# Altium PCB [N76E003] Kit.PcbDoc
Units mm, origin at the board's own origin, x right, y up, seen from the top; angles counter-clockwise.
Board outline 39.88 x 56.64 mm, 2 copper layers (Top Layer, Bottom Layer); 29 components, 42 nets, 177 pads, 21 vias.
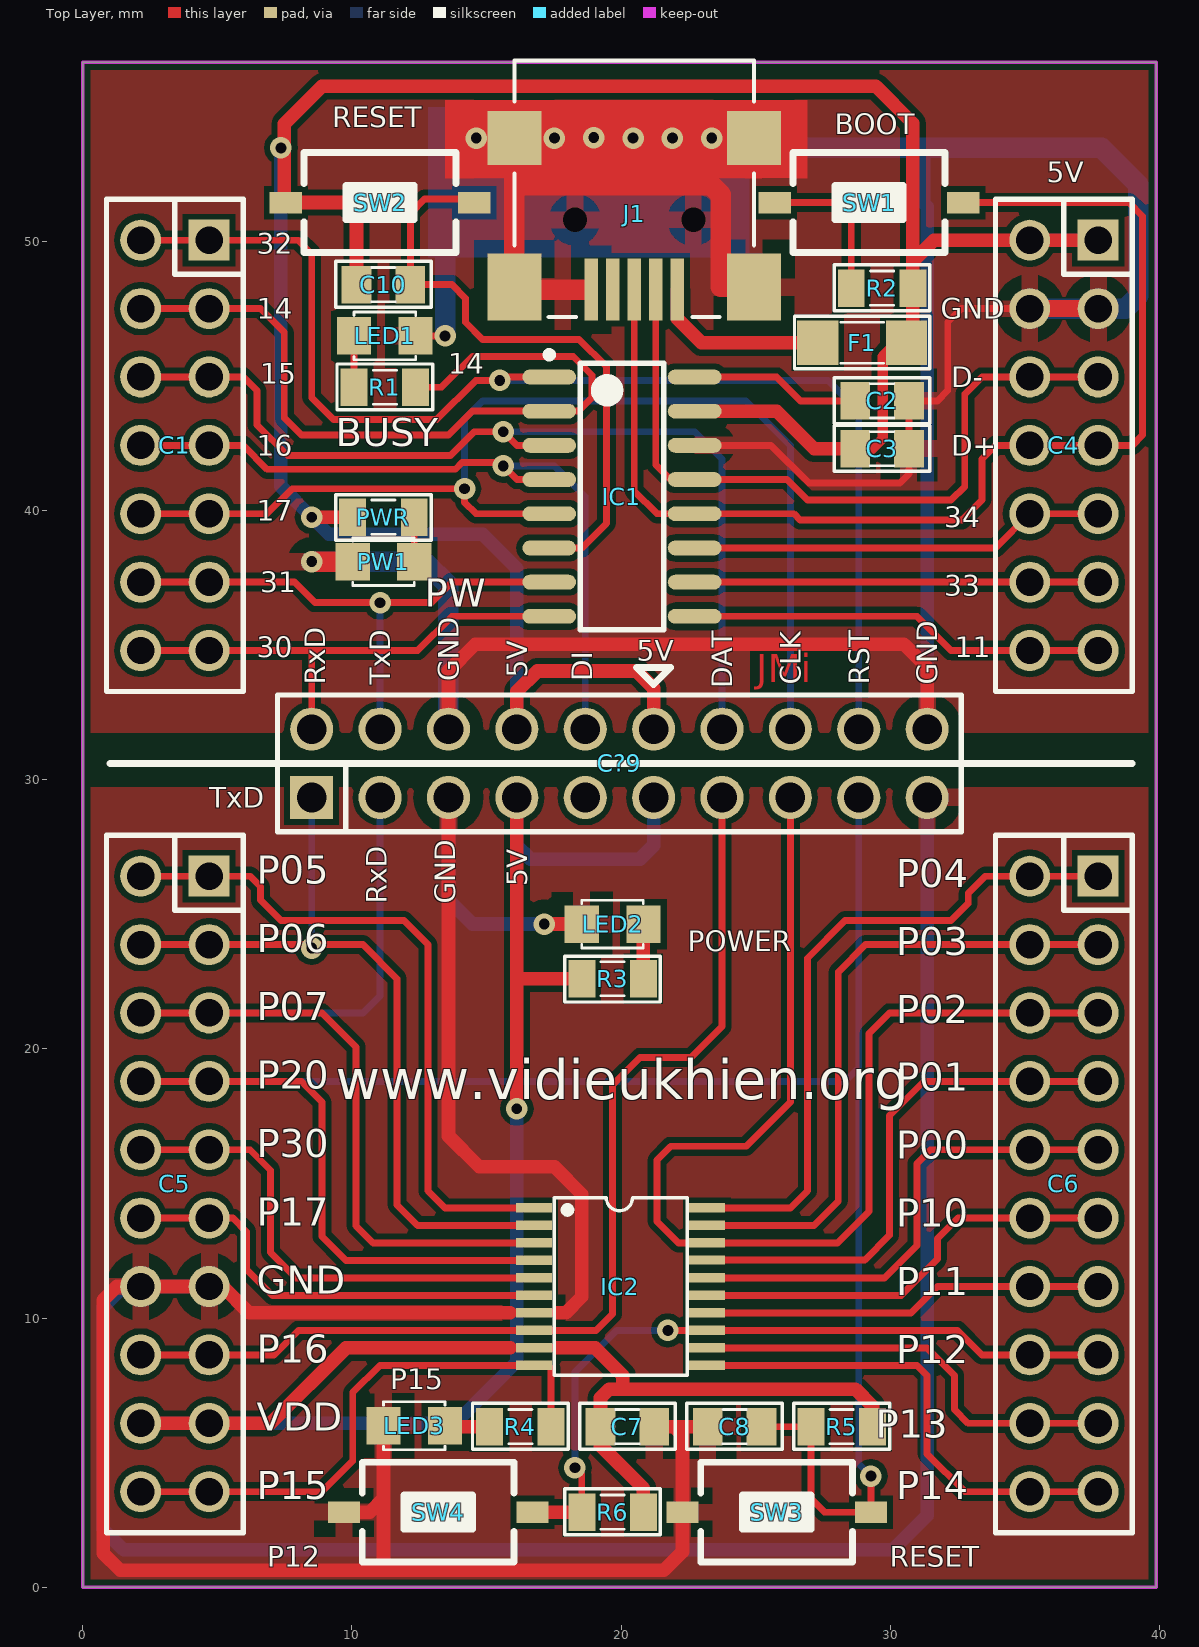
[diagram p0: Top Layer view]
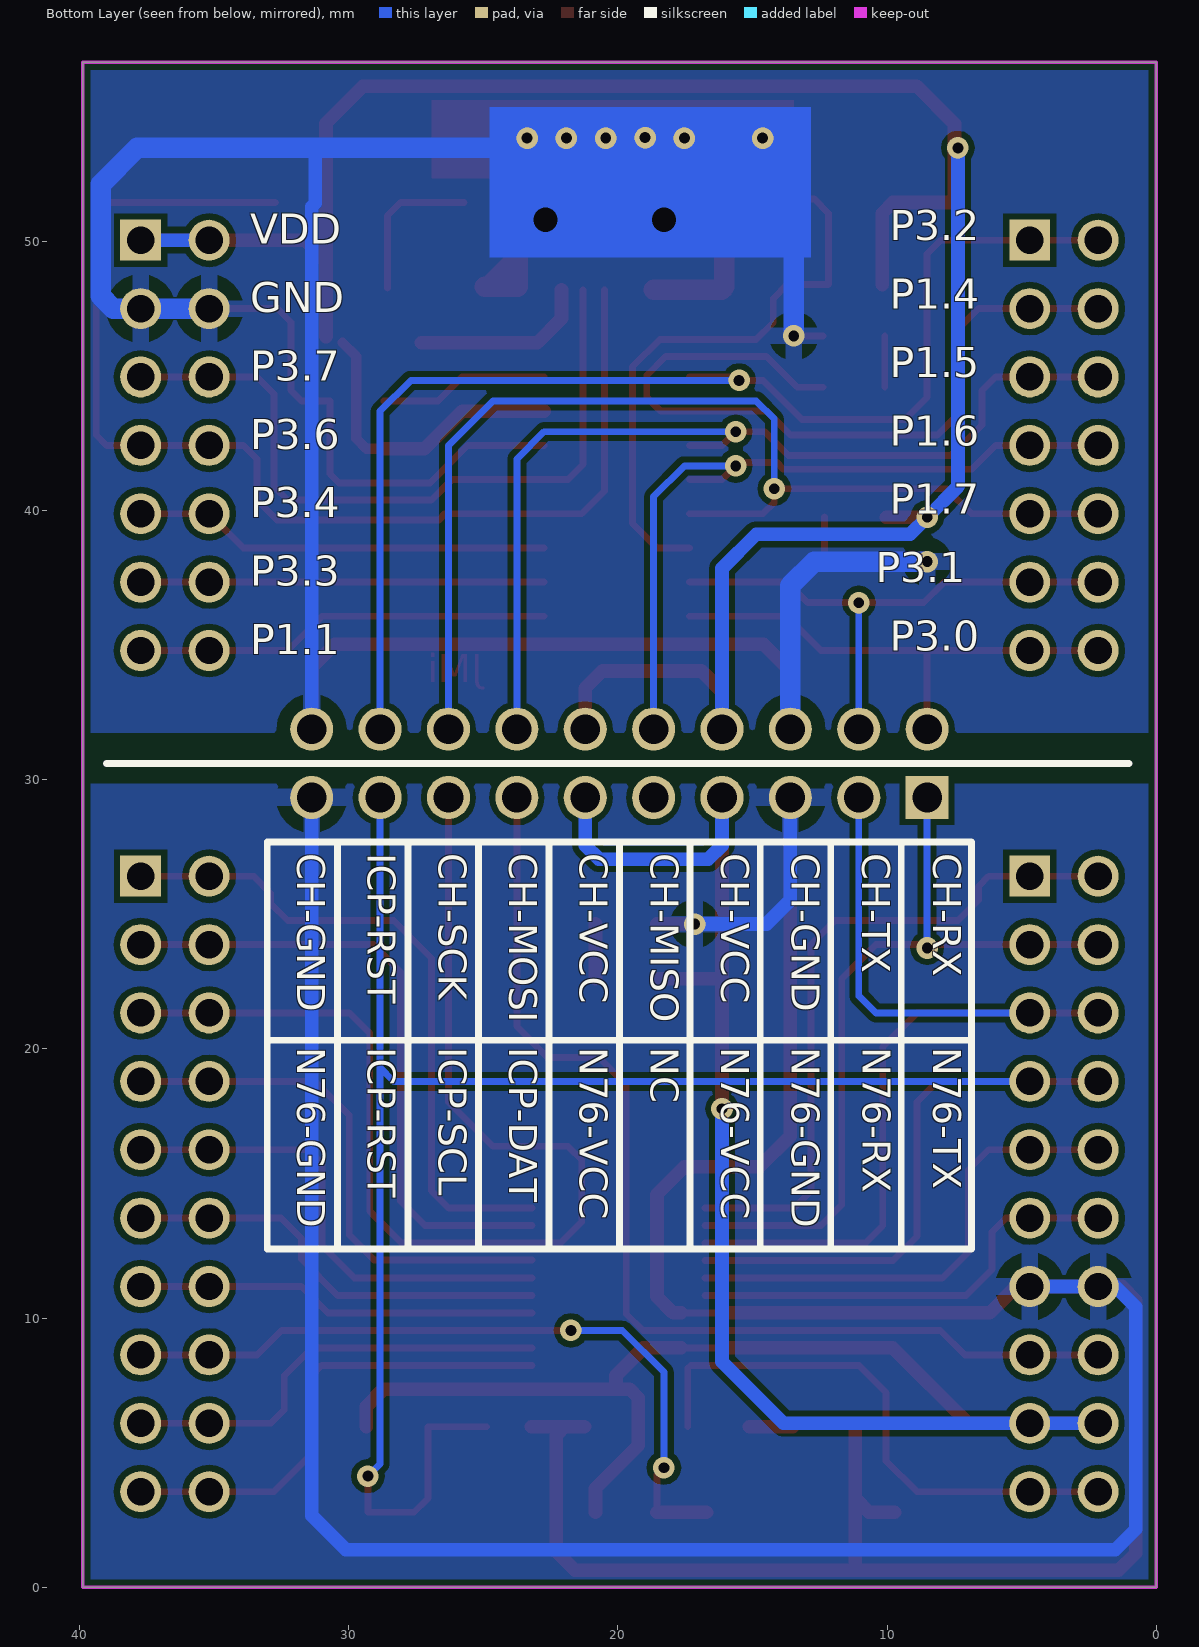
[diagram p1: Bottom Layer view, seen from below]
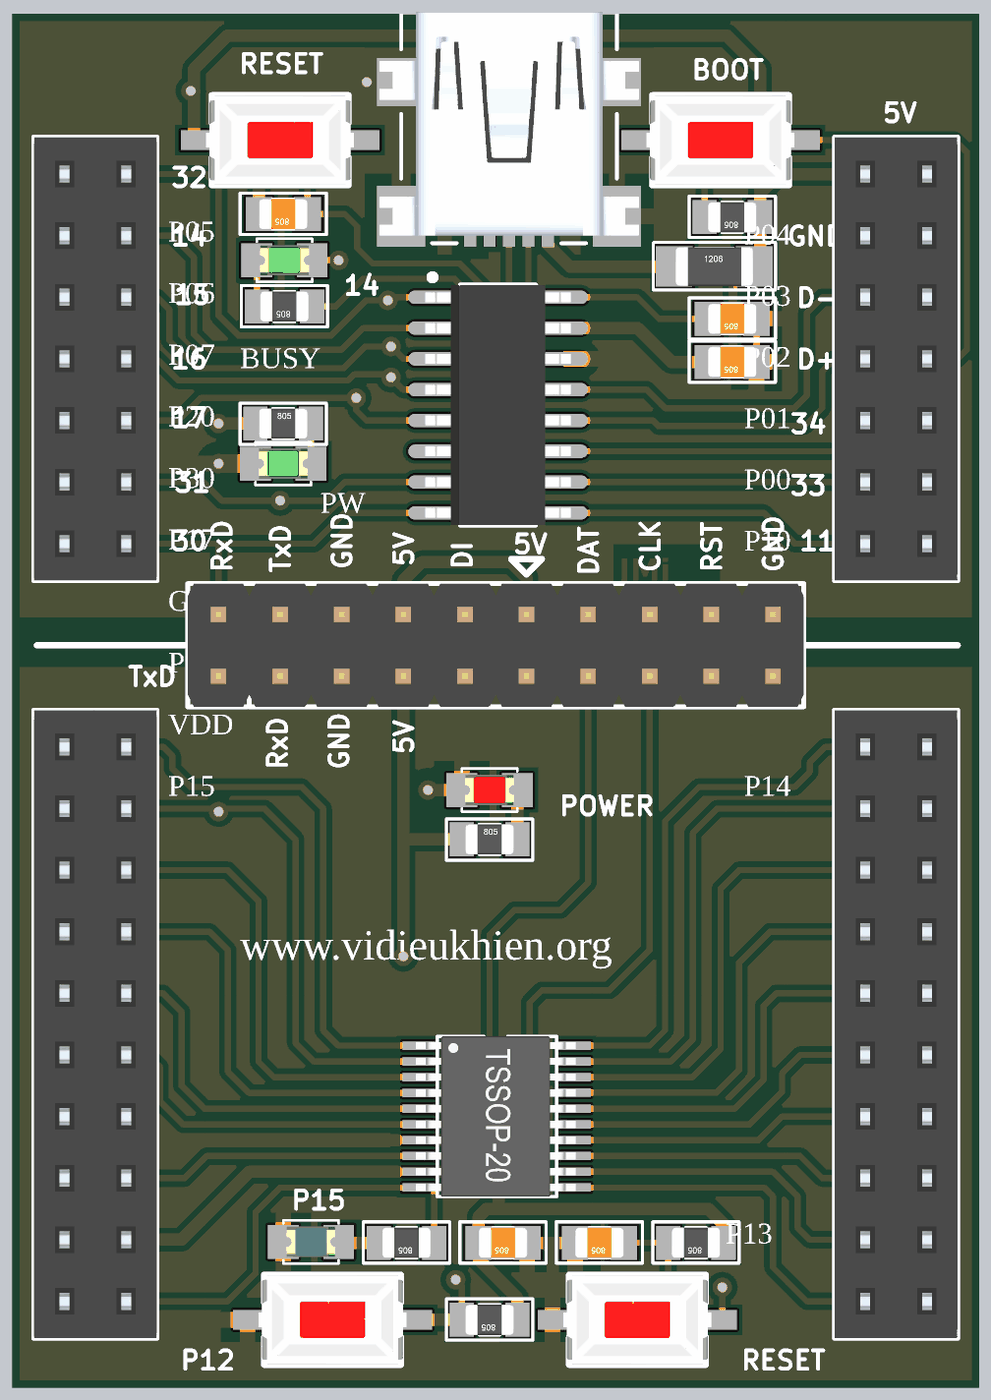
[diagram p2: 3D render of the assembled board from above, using the file's embedded part models]

## Layer stack, top to bottom
Top Solder: solder mask 0.0102, Solder Resist, Dk 3.5
Top Layer: signal copper 0.0356
Dielectric 1: dielectric 0.32, FR-4, Dk 4.8
Bottom Layer: signal copper 0.0356
Bottom Solder: solder mask 0.0102, Solder Resist, Dk 3.5

## Board outline
0,0 39.878,0 39.878,56.642 0,56.642

## Design rules (kind name [scope] priority, off if disabled: settings)
Clearance [All] p1: gap=0.229
PolygonConnect [All] p1: connectstyle=Relief reliefconductorwidth=0.635 reliefentries=4 polygonreliefangle="90 Angle" airgapwidth=0.508
RoutingVias [All] p1: holewidth=0.711 width=1.27 viastyle="Through Hole" minholewidth=0.4 minwidth=0.8 maxholewidth=0.711 maxwidth=1.27
SolderMaskExpansion [All] p1: expansion=0.102
Width [All] p1: maxlimit=0.762 minlimit=0.254 preferedwidth=0.508
30 further rules are at their usual default settings.

## Components (designator, comment, footprint, x,y, rotation, side; value= is the part's Value field where it differs from the comment)
C1 "JP7x2" JP7-C2T 3.429,42.418 r270 top
C2 "104" CN-SMD-0805 29.693,44.069 r180 top
C3 "104" CN-SMD-0805 29.693,42.291 r180 top
C4 "JP7x2" JP7-C2T 36.449,42.418 r270 top
C5 "JP10x2" JP10-C2T 3.429,14.986 r270 top
C6 "JP10x2" JP10-C2T 36.449,14.986 r270 top
C7 "103" CN-SMD-0805 20.237,5.969 r180 top
C8 "105" CN-SMD-0805 24.216,5.969 r180 top
C10 "104" CN-SMD-0805 11.176,48.387 r180 top
C?9 "JP10x2" JP10-D2T 19.939,30.607 r0 top
F1 "F1A" SM-RES-1206 27.305,46.228 r0 top
IC1 "CH551G" SOP16 20.033,40.513 r0 top
IC2 "N76" TSSOP20 16.764,14.097 r0 top
J1 "USB-5" USB-M3 20.488,48.2 r0 top
LED1 "LED" LED-0805-Green 10.084,46.482 r0 top
LED2 "LED" LED-0805-Red 20.828,24.638 r180 top
LED3 "LED" LED-0805-Blue 13.462,6.007 r180 top
PW1 "LED" LED-0805-Green 12.319,38.1 r180 top
PWR "330" RES-SMD-0805 11.176,39.751 r0 top
R1 "330" RES-SMD-0805 11.227,44.577 r180 top
R2 "10K" RES-SMD-0805 29.693,48.26 r180 top
R3 "330" RES-SMD-0805 19.685,22.606 r0 top
R4 "330" RES-SMD-0805 16.259,5.969 r180 top
R5 "10K" RES-SMD-0805 28.194,5.969 r180 top
R6 "10K" RES-SMD-0805 19.685,2.794 r180 top
SW1 "SW" SW1-SMD 29.21,51.435 r0 top
SW2 "SW" SW1-SMD 11.049,51.435 r0 top
SW3 "SW" SW1-SMD 25.781,2.794 r0 top
SW4 "SW" SW1-SMD 13.208,2.794 r0 top

## Footprints (in the part's own frame and the unit in brackets; to place one, negate y for a bottom-side part, rotate by r counter-clockwise, add the part's x,y. Pads: shape width x height; smd on the part's side, far side on the other; paste and mask are expansions set on the pad)
CN-SMD-0805 [mm]
  rect 1.1x1.397 smd: 1(-1,0) 2(1,0)
  silkscreen extent -1.78,-0.86 1.78,0.84, body extent -1,-0.62 1,0.63, height 0.8
JP7-C2T [mm] "14 pins, dual row, straight, gold plating"
  rect 1.52x1.52 hole 1.02: 1(-7.62,1.27)
  round 1.52 hole 1.02: 2(-5.08,1.27) 3(-2.54,1.27) 4(0,1.27) 5(2.54,1.27) 6(5.08,1.27) 7(7.62,1.27) 8(7.62,-1.27) 9(5.08,-1.27) 10(2.54,-1.27) 11(0,-1.27) 12(-2.54,-1.27) 13(-5.08,-1.27) 14(-7.62,-1.27)
  silkscreen extent -9.14,-2.54 9.14,2.54, body extent -9.14,-2.54 9.14,2.54, height 8.51
JP10-C2T [mm] "20 pins, dual row, straight, gold plating"
  rect 1.52x1.52 hole 1.02: 1(-11.43,1.27)
  round 1.52 hole 1.02: 2(-8.89,1.27) 3(-6.35,1.27) 4(-3.81,1.27) 5(-1.27,1.27) 6(1.27,1.27) 7(3.81,1.27) 8(6.35,1.27) 9(8.89,1.27) 10(11.43,1.27) 11(11.43,-1.27) 12(8.89,-1.27) 13(6.35,-1.27) 14(3.81,-1.27) 15(1.27,-1.27) 16(-1.27,-1.27) 17(-3.81,-1.27) 18(-6.35,-1.27) 19(-8.89,-1.27) 20(-11.43,-1.27)
  silkscreen extent -12.95,-2.54 12.95,2.54, body extent -12.95,-2.54 12.95,2.54, height 8.51
JP10-D2T [mm] "20 pins, dual pin, straight, gold plating"
  rect 1.6x1.6 hole 1.1: 1(-11.43,-1.27)
  round 1.6 hole 1.1: 2(-8.89,-1.27) 3(-6.35,-1.27) 4(-3.81,-1.27) 5(-1.27,-1.27) 6(1.27,-1.27) 7(3.81,-1.27) 8(6.35,-1.27) 9(8.89,-1.27) 10(11.43,-1.27) 11(11.43,1.27) 12(8.89,1.27) 13(6.35,1.27) 14(3.81,1.27) 15(1.27,1.27) 16(-1.27,1.27) 17(-3.81,1.27) 18(-6.35,1.27) 19(-8.89,1.27) 20(-11.43,1.27)
  silkscreen extent -12.7,-2.54 12.7,2.54, body extent -12.7,-2.54 12.7,2.54, height 8.55
LED-0805-Blue [mil]
  rect 50x55 smd: 1(0,0) 2(90,0)
  silkscreen extent 0,-35 90,35, body extent 5,-25 85,25, height 43
LED-0805-Green [mil]
  rect 50x55 smd: 1(0,0) 2(90,0)
  silkscreen extent 0,-35 90,35, body extent 5,-25 85,25, height 43
LED-0805-Red [mil]
  rect 50x55 smd: 1(0,0) 2(90,0)
  silkscreen extent 0,-35 90,35, body extent 5,-25 85,25, height 43
RES-SMD-0805 [mil]
  rect 39.37x55 smd: 1(-45,0) 2(45,0)
  silkscreen extent -70,-34 70,33, body extent -39,-25 39,25, height 31
SM-RES-1206 [mil]
  rect 60x65 smd: 1(0,0) 2(130,0)
  silkscreen extent -34,-38 164,39, body extent 2,-31 128,32, height 40
SOP16 [mm] "SOIC, 16-Leads, Body 9.90x3.91mm, Pitch 1.27mm, IPC Medium Density"
  oval 2x0.55 smd: 1(-2.7,4.445) 2(-2.7,3.175) 3(-2.7,1.905) 4(-2.7,0.635) 5(-2.7,-0.635) 6(-2.7,-1.905) 7(-2.7,-3.175) 8(-2.7,-4.445) 9(2.7,-4.445) 10(2.7,-3.175) 11(2.7,-1.905) 12(2.7,-0.635) 13(2.7,0.635) 14(2.7,1.905) 15(2.7,3.175) 16(2.7,4.445)
  silkscreen extent -2.82,-4.95 1.55,5.39, body extent -3,-4.95 3,4.95, height 1.4
SW1-SMD [mm]
  rect 1.2x0.8 smd: 1(-3.5,0) 2(3.5,0)
  silkscreen extent -2.82,-1.85 2.82,1.85, body extent -3.05,-1.85 3.05,1.85, height 2.5
TSSOP20 [mm]
  rect 1.35x0.35 smd: 1(0,0) 2(0,-0.65) 3(0,-1.3) 4(0,-1.95) 5(0,-2.6) 6(0,-3.25) 7(0,-3.9) 8(0,-4.55) 9(0,-5.2) 10(0,-5.85) 11(6.425,-5.85) 12(6.425,-5.2) 13(6.425,-4.55) 14(6.425,-3.9) 15(6.425,-3.25) 16(6.425,-2.6) 17(6.425,-1.935) 18(6.425,-1.3) 19(6.425,-0.65) 20(6.425,0)
  silkscreen extent 0.76,-6.22 5.69,0.38, body extent -0.12,-6.22 6.47,0.38, height 1.2
USB-M3 [mm]
  rect 0.5x2.3 smd mask+0.025: 1(1.6,0) 2(0.8,0) 3(0,0) 4(-0.8,0) 5(-1.6,0)
  rect 2x2.5 smd mask+0: 5(-4.45,0.1) 5(4.45,0.1)
  rect 2x2 smd mask+0: 5(-4.45,5.631) 5(4.45,5.631)
  round 0.6 hole 0.9 unplated: 5(-2.2,2.6) 5(2.2,2.6)
  silkscreen extent -4.44,-1.02 4.44,8.51, body extent -5.35,-0.7 5.35,8.5, height 3.95

## Part data
C1 C4 C5 C6 C?9: "WR-PHD 2.54 mm Dual Socket Header"
C2 C3 C7 C8 C10: library part CM, "Cap SMD"
F1: library part Fuse, "Fuse"
IC1: library part "[MCU] CH551G"
IC2: library part "[MCU] N76E003", "Core  - 1T 8051 processor  - Max frequency up to16 MHz  - Wide operating voltage: 2.4V to 5.5V  - Temperature range: -40? to 105?    Memory  - 18 KB of Flash memory  - 1 KB of SRAM  - Supports configurable Data Flash  - Supports program update by:    ISP (In-System Programming)  ICP (In-Circuit Programming)  IAP (In-Application Programming)  PWM  - Up to 6-ch PWM  - Programmable dead-zone generator    ADC  - 12-bit 8-ch ADC  - Runs up to 500 kSPS    Connectivity  - Two UARTs up to 115200 bps  - One SPI up to 8 MHz  - One I²C up to 400 kHz    Clock Control  - < 2% deviation16 MHz Internal RC oscillator  - 10 kHz Internal RC oscillator"
LED1 LED2 LED3 PW1: library part "LED SMD"
PWR R1 R2 R3 R4 R5 R6: library part Res-SMD, "Resistor"
SW1 SW2 SW3 SW4: library part SW2, "Switch button 2 pin"

## Via types
v1: diameter 0.8, hole 0.4, Top Layer to Bottom Layer, tented both sides, 21 vias

## Nets (pads, with @x,y where several pads share a name; then routed paths per layer and width w, separated by ;. In a path a pad name is that pad's centre, name@x,y a point inside that pad or via, vN(x,y) a via of type N, cw(c..) or ccw(c..) an arc to the next point about the centre after c; other vN are vias at no path point)
+3.3V: C2.2 IC1.16 | length 6.3
  Top Layer w0.254: IC1.16 25.781,44.958 26.67,44.069 C2.2
BUSY: C1.2 C1.13 IC1.2 R1.1 | length 29.3
  Top Layer w0.254: C1.13 C1.2 6.604,47.498 7.493,46.609 7.493,43.434 8.128,42.799 13.589,42.799 14.478,43.688 IC1.2 18.415,43.688 18.923,44.196 18.923,45.021 18.224,45.72 14.478,45.72 13.335,44.577 R1.1
CH-RX: C1.7 C1.8 C?9.20 IC1.8 | length 18.6
  Top Layer w0.254: C1.8 C1.7 8.509,34.798 ; C?9.20 8.509,34.798 ; IC1.8 13.716,36.068 12.446,34.798 8.509,34.798
CH-TX: C1.6 C1.9 C?9.19 IC1.7 | length 20.5
  Top Layer w0.254: C1.9 C1.6 7.874,37.338 8.636,36.576 v1(11.049,36.576) 12.954,36.576 13.716,37.338 IC1.7
  Bottom Layer w0.254: C?9.19 v1(11.049,36.576)
D+: C4.4 C4.11 IC1.12 J1.3 SW1.2 | length 44
  Top Layer w0.254: J1.3 20.488,40.726 21.336,39.878 IC1.12 26.416,39.878 26.645,39.649 32.664,39.649 33.401,40.386 33.401,41.91 33.909,42.418 C4.11 C4.4 38.989,42.418 39.37,42.799 39.37,50.927 38.862,51.435 SW1.2
D-: C4.3 C4.12 IC1.13 J1.2 | length 27.5
  Top Layer w0.254: J1.2 21.288,41.704 21.844,41.148 IC1.13 26.162,41.148 26.924,40.386 32.258,40.386 32.766,40.894 32.766,44.323 33.401,44.958 C4.12 C4.3 C4.3@37.846,44.958
GND: C2.1 C3.1 C4.2 C4.13 C?9.11 C?9.18 IC1.14 J1.5 LED1.2 PW1.2 | length 153.1
  Top Layer w0.254: LED1.2 v1(13.462,46.482) ; IC1.14 25.574,42.418 26.971,41.021 30.353,41.021 30.692,41.36 C3.1 C2.1 31.75,44.069 32.131,44.45 32.131,46.99 32.639,47.498 C4.13 ; C4.2 C4.2@37.846,47.498
  Top Layer w0.508: C?9.18 13.589,34.036 14.582,35.029 30.503,35.029 31.369,34.163 C?9.11
  Top Layer w0.635: C4.13 C4.2
  Top Layer w0.762: v1(8.509,38.1) PW1.2 ; v1(14.622,53.831) J1.5@16.038,53.831 ; J1.5@18.669,48.2 16.138,48.2 16.038,48.3 16.038,52.07 ; J1.5@24.938,48.3 J1.5@24.812,48.3 ; J1.5@24.938,53.831 v1(23.368,53.831) v1(21.907,53.831) v1(20.447,53.831) v1(17.526,53.831) J1.5@16.038,53.831 ; 16.038,52.07 23.368,52.07 23.709,51.729 23.709,49.403 ; 16.038,52.07 J1.5@16.038,53.831 ; 23.709,49.403 23.709,48.3 J1.5@24.812,48.3 ; 23.709,49.403 J1.5@24.812,48.3
  Bottom Layer w0.508: 31.242,53.467 31.242,51.408 31.369,51.281 C?9.11
  Bottom Layer w0.762: v1(8.509,38.1) 12.7,38.1 13.589,37.211 C?9.18 ; v1(13.462,46.482) 13.462,52.451 14.478,53.467 v1@14.605,53.467 ; v1@14.605,53.848 v1(14.622,53.831) ; v1@14.622,53.467 31.242,53.467 37.846,53.467 39.205,52.108 39.205,47.968 38.735,47.498 C4.2 C4.13
  other v1: 18.986,53.848
GND1: C5.7 C5.14 C7.1 C8.2 C?9.3 C?9.10 IC2.7 LED2.2 LED3.2 SW3.1 SW4.1 | length 165.9
  Top Layer w0.254: 15.875,10.197 IC2.7 17.647,10.197
  Top Layer w0.508: SW4.1 10.668,2.794 11.176,3.302 ; LED3.2 11.176,3.302 ; C?9.3 13.589,16.764 14.732,15.621 17.526,15.621 18.542,14.605 18.542,10.795 17.944,10.197 17.647,10.197 ; 15.875,10.197 6.186,10.197 5.207,11.176 C5.7 C5.14 1.27,11.176 0.762,10.668 0.762,1.27 1.397,0.635 11.176,0.635 ; v1(17.145,24.638) LED2.2 ; C7.1 21.971,5.969 ; C8.2 21.971,5.969 ; 11.176,0.635 21.59,0.635 22.281,1.326 SW3.1 22.281,5.659 21.971,5.969 ; 11.176,0.635 11.176,3.302
  Bottom Layer w0.508: C5.7 C5.14 1.524,11.176 0.762,10.414 0.762,2.159 1.524,1.397 30.099,1.397 31.369,2.667 C?9.10 ; C?9.3 13.589,25.527 14.478,24.638 v1(17.145,24.638)
ICPCK: C1.5 C1.10 C?9.13 IC1.5 | length 42.4
  Top Layer w0.254: C1.10 C1.5 6.858,39.878 7.785,40.805 v1(14.186,40.805) 14.186,40.297 14.605,39.878 IC1.5
  Bottom Layer w0.254: v1(14.186,40.805) 14.186,43.396 14.859,44.069 24.638,44.069 26.289,42.418 C?9.13
ICPDA: C1.3 C1.12 C?9.14 IC1.3 | length 36.3
  Top Layer w0.254: C1.12 C1.3 5.969,44.958 6.477,44.45 6.477,43.18 7.62,42.037 13.667,42.037 14.556,42.926 v1(15.621,42.926) 16.129,42.418 IC1.3
  Bottom Layer w0.254: v1(15.621,42.926) 22.733,42.926 23.749,41.91 C?9.14
N76-RX: C5.3 C5.18 C?9.2 IC2.3 | length 36
  Top Layer w0.254: C5.18 C5.3 8.89,21.336 10.16,20.066 10.16,13.432 10.795,12.797 IC2.3
  Bottom Layer w0.254: C5.3 10.414,21.336 11.049,21.971 C?9.2
N76-TX: C5.2 C5.19 C?9.1 IC2.2 | length 29.4
  Top Layer w0.254: C5.19 C5.2 10.414,23.876 11.684,22.606 11.684,14.209 12.446,13.447 IC2.2
  Bottom Layer w0.254: v1(8.509,23.749) C?9.1
NetF1_1: F1.1 J1.1 | length 6.7
  Top Layer w0.508: J1.1 22.088,47.127 22.987,46.228 F1.1
NetLED1_1: LED1.1 R1.2 | length 1.9
  Top Layer w0.254: R1.2 LED1.1
NetLED2_1: LED2.1 R3.2 | length 2
  Top Layer w0.508: R3.2 LED2.1
NetLED3_1: LED3.1 R4.2 | length 1.7
  Top Layer w0.508: LED3.1 13.5,5.969 R4.2
NetPW1_1: PW1.1 PWR.2 | length 1.7
  Top Layer w0.254: PW1.1 PWR.2
NetR2_2: R2.2 SW1.1 | length 5.7
  Top Layer w0.254: SW1.1 28.067,51.435 28.55,50.952 R2.2
P00: C6.5 C6.16 IC2.16 | length 18.4
  Top Layer w0.254: IC2.16 29.785,11.497 30.988,12.7 30.988,15.748 31.496,16.256 C6.16 C6.5 C6.5@37.846,16.256
P01: C6.4 C6.17 IC2.17 | length 20
  Top Layer w0.254: IC2.17 29.053,12.162 29.972,13.081 29.972,17.526 31.242,18.796 C6.17 C6.4 C6.4@37.846,18.796
P1.1: C4.7 C4.8 IC1.9 | length 15.6
  Top Layer w0.254: IC1.9 30.988,36.068 32.258,34.798 C4.8 C4.7 ; C4.7@37.782,34.861 C4.7@37.846,34.798
P1.6: C1.4 C1.11 C?9.16 IC1.4 | length 28.1
  Top Layer w0.254: C1.11 C1.4 5.969,42.418 6.858,41.529 13.841,41.529 14.089,41.777 15.5,41.777 v1(15.621,41.656) 16.129,41.148 IC1.4
  Bottom Layer w0.254: v1(15.621,41.656) 17.526,41.656 18.669,40.513 C?9.16
P02: C6.3 C6.18 C?9.8 IC2.18 | length 43.6
  Top Layer w0.254: C?9.8 26.289,18.034 24.638,16.383 21.844,16.383 21.336,15.875 21.336,13.589 22.128,12.797 IC2.18 28.037,12.797 29.21,13.97 29.21,20.574 29.972,21.336 C6.18 C6.3
P03: C6.2 C6.19 IC2.19 | length 24
  Top Layer w0.254: IC2.19 27.163,13.447 28.067,14.351 28.067,22.86 29.083,23.876 C6.19 C6.2 C6.2@37.846,23.876
P3.3: C4.6 C4.9 IC1.10 | length 15.1
  Top Layer w0.254: IC1.10 C4.9 C4.6 C4.6@37.846,37.338
P3.4: C4.5 C4.10 IC1.11 | length 15.6
  Top Layer w0.254: IC1.11 33.909,38.608 C4.10 ; C4.10@35.242,39.814 35.306,39.878 C4.5 C4.5@37.846,39.878
P04: C6.1 C6.20 IC2.20 | length 25
  Top Layer w0.254: IC2.20 26.289,14.097 26.924,14.732 26.924,23.368 28.321,24.765 32.258,24.765 32.893,25.4 32.893,25.781 33.528,26.416 C6.20 C6.1 C6.1@37.846,26.416
P05: C5.1 C5.20 IC2.1 | length 25.4
  Top Layer w0.254: C5.20 C5.1 6.223,26.416 6.604,26.035 6.604,25.527 7.366,24.765 11.938,24.765 12.827,23.876 12.827,14.732 13.462,14.097 IC2.1
P10: C6.6 C6.15 IC2.15 | length 16.3
  Top Layer w0.254: IC2.15 30.405,10.847 31.75,12.192 31.75,12.954 32.512,13.716 C6.15 C6.6 C6.6@37.846,13.716
P11: C6.7 C6.14 IC2.14 | length 15.1
  Top Layer w0.254: IC2.14 30.771,10.197 31.75,11.176 C6.14 C6.7 C6.7@37.846,11.176
P12: C6.8 C6.13 IC2.13 R6.2 SW4.2 | length 27.7
  Top Layer w0.254: v1(18.288,4.445) 18.542,4.191 R6.2 ; v1(21.739,9.547) IC2.13 32.49,9.547 33.401,8.636 C6.13 C6.8 C6.8@37.846,8.636
  Top Layer w0.508: SW4.2 R6.2
  Bottom Layer w0.254: v1(18.288,4.445) 18.288,8.001 19.834,9.547 v1(21.739,9.547)
P13: C6.9 C6.12 IC2.12 | length 16.6
  Top Layer w0.254: IC2.12 31.362,8.897 32.385,7.874 32.385,6.604 32.893,6.096 C6.12 C6.9 C6.9@37.846,6.096
P14: C6.10 C6.11 IC2.11 | length 18.3
  Top Layer w0.254: IC2.11 30.996,8.247 31.369,7.874 31.369,4.953 32.766,3.556 C6.11 C6.10 C6.10@37.846,3.556
P15: C5.10 C5.11 IC2.10 R4.1 | length 20.9
  Top Layer w0.254: C5.11 C5.10 8.89,3.556 10.033,4.699 10.033,7.239 11.041,8.247 IC2.10 17.28,8.247 17.402,8.125 R4.1
P16: C5.8 C5.13 C?9.7 IC2.8 | length 40.1
  Top Layer w0.254: C5.13 C5.8 7.112,8.636 8.023,9.547 IC2.8 19.072,9.547 19.685,10.16 19.685,18.669 20.701,19.685 22.606,19.685 23.749,20.828 C?9.7
P17: C5.6 C5.15 IC2.6 | length 16.6
  Top Layer w0.254: C5.15 C5.6 5.588,13.716 6.096,13.208 6.096,11.811 7.06,10.847 IC2.6
P20: C5.4 C5.17 C8.1 C?9.9 IC2.4 R5.2 SW3.2 | length 78.6
  Top Layer w0.254: C5.17 C5.4 8.128,18.796 8.89,18.034 8.89,13.036 9.779,12.147 IC2.4 ; C8.1@24.876,5.969 R5.2 27.051,3.302 27.559,2.794 SW3.2 v1(29.281,4.135)
  Bottom Layer w0.254: C5.4 28.321,18.796 28.829,19.304 ; C?9.9 28.829,19.304 ; v1(29.281,4.135) 28.829,4.587 28.829,19.304
P30: C5.5 C5.16 IC2.5 | length 18.4
  Top Layer w0.254: C5.16 C5.5 6.223,16.256 6.985,15.494 6.985,12.446 7.934,11.497 IC2.5
RST: C1.1 C1.14 C?9.12 IC1.1 | length 47.4
  Top Layer w0.254: C1.14 C1.1 8.001,50.038 8.509,49.53 8.509,44.196 9.325,43.38 13.154,43.38 14.605,44.831 v1(15.494,44.831) 15.494,44.958 IC1.1
  Bottom Layer w0.254: v1(15.494,44.831) 27.686,44.831 28.829,43.688 C?9.12
RST_CH: C10.1 IC1.6 SW2.2 | length 22.7
  Top Layer w0.254: SW2.2@14.605,51.562 12.7,51.562 12.176,51.038 C10.1 13.716,48.387 14.224,47.879 14.224,46.99 14.859,46.355 18.44,46.355 19.456,45.339 19.456,39.522 18.542,38.608 IC1.6
VDD: C3.2 C4.1 C4.14 C10.2 C?9.15 C?9.17 F1.2 IC1.15 PWR.1 R2.1 SW2.1 | length 100.9
  Top Layer w0.381: C3.2 29.337,42.291 29.718,42.672 29.718,45.72 F1.2@30.226,46.228
  Top Layer w0.508: v1(8.509,39.751) PWR.1 ; C10.2 10.176,51.038 9.779,51.435 SW2.1 7.493,51.435 7.493,54.356 8.89,55.753 29.464,55.753 30.836,54.381 30.836,49.251 ; C?9.17 16.129,33.274 16.891,34.036 20.574,34.036 21.209,33.401 C?9.15 ; IC1.15 25.781,43.688 27.178,42.291 C3.2 ; F1.2@30.836,46.457 R2.1 30.836,49.251 ; C4.1 C4.14 31.623,50.038 30.836,49.251
  Bottom Layer w0.508: v1(7.366,53.467) 7.366,40.894 v1(8.509,39.751) 9.144,39.116 14.859,39.116 16.129,37.846 C?9.17 ; C4.14 C4.1 C4.1@37.846,50.038
VDD1: C5.9 C5.12 C7.2 C?9.4 C?9.6 IC2.9 R3.1 R5.1 R6.1 | length 83.6
  Top Layer w0.254: 15.881,8.897 IC2.9 17.647,8.897
  Top Layer w0.508: C5.12 C5.9 6.985,6.096 9.786,8.897 15.881,8.897 ; v1(16.129,17.78) 16.129,22.733 ; C?9.4 16.129,22.733 ; 17.647,8.897 19.043,8.897 20.066,7.874 20.066,7.366 ; R3.1 16.256,22.606 16.129,22.733 ; R6.1 20.828,3.683 19.237,5.274 C7.2 19.237,7.045 19.558,7.366 20.066,7.366 ; R5.1 29.337,6.731 28.702,7.366 20.066,7.366
  Bottom Layer w0.508: C5.12 C5.9 13.843,6.096 16.129,8.382 v1(16.129,17.78) ; C?9.4 16.129,27.559 16.637,27.051 20.701,27.051 21.209,27.559 C?9.6
pads on no net: C?9.5 J1.4

## Polygon pours and split planes (outlines as drawn)
GND on Bottom Layer "Bottom Layer-No Net" (solid, pour order 32): 0,56.642 39.878,56.642 39.878,31.75 -0.127,31.75
GND1 on Bottom Layer "Bottom Layer-No Net" (solid, pour order 24): 0,29.972 0.127,29.845 39.878,29.845 39.878,0.127 40.005,0 0,0
GND on Top Layer "Bottom Layer-No Net" (solid, pour order 30): 0,56.642 39.878,56.642 39.878,31.75 0,31.75
GND1 on Top Layer "Bottom Layer-No Net" (solid, pour order 26): 0,29.718 39.878,29.718 39.878,0.127 0.127,0.127 -0.127,-0.127

## Keep-outs
Keep-Out Layer:
  the board outline again, w0.127

## Other copper
Top Layer:
  rectangle net GND: 13.462,52.324 26.924,55.245
  text "JMi" at 25.019,33.274 h1.78
Bottom Layer:
  rectangle net GND: 12.827,49.403 24.765,54.991

## Silkscreen, mask and mechanical layers (free items; w line width, h text height)
Top Overlay:
  lines w0.254: 1.016,30.607 38.989,30.607 ; 20.574,34.163 21.59,34.163 21.844,34.163 21.209,33.528 20.574,34.163
  text "RESET" at 9.271,54.229 h0.76
  text "BOOT" at 27.94,53.975 h0.76
  text "5V" at 35.814,52.197 h0.76
  text "32" at 6.477,49.53 h0.76
  text "14" at 6.477,47.117 h0.76
  text "GND" at 31.877,47.117 h0.76
  text "14" at 13.589,45.085 h0.76
  text "15" at 6.604,44.704 h0.76
  text "D-" at 32.258,44.577 h0.76
  text "16" at 6.477,42.037 h0.76
  text "BUSY" at 9.398,42.037 h1.78
  text "D+" at 32.258,42.037 h0.76
  text "17" at 6.477,39.624 h0.76
  text "34" at 32.004,39.37 h0.76
  text "31" at 6.604,36.957 h0.76
  text "33" at 32.004,36.83 h0.76
  text "PW" at 12.7,36.068 h1.78
  text "30" at 6.477,34.544 h0.76
  text "11" at 32.385,34.544 h0.76
  text "5V" at 20.574,34.417 h0.76
  text "5V" at 16.51,33.782 h0.76 r90
  text "GND" at 13.97,33.655 h0.76 r90
  text "DI" at 18.923,33.655 h0.76 r90
  text "RxD" at 9.017,33.528 h0.76 r90
  text "TxD" at 11.43,33.528 h0.76 r90
  text "CLK" at 26.67,33.528 h0.76 r90
  text "RST" at 29.21,33.528 h0.76 r90
  text "GND" at 31.75,33.528 h0.76 r90
  text "DAT" at 24.13,33.401 h0.76 r90
  text "TxD" at 4.699,28.956 h0.76
  text "5V" at 16.51,26.035 h0.76 r90
  text "P05" at 6.477,25.781 h1.78
  text "P04" at 30.226,25.654 h1.78
  text "RxD" at 11.303,25.4 h0.76 r90
  text "GND" at 13.843,25.4 h0.76 r90
  text "POWER" at 22.479,23.622 h0.76
  text "P06" at 6.477,23.241 h1.78
  text "P03" at 30.226,23.131 h1.78
  text "P07" at 6.477,20.706 h1.78
  text "P02" at 30.226,20.608 h1.78
  text "P20" at 6.477,18.161 h1.78
  text "P01" at 30.226,18.085 h1.78
  text "www.vidieukhien.org" at 9.398,17.653 h2.54
  text "P30" at 6.477,15.621 h1.78
  text "P00" at 30.226,15.562 h1.78
  text "P17" at 6.477,13.086 h1.78
  text "P10" at 30.226,13.039 h1.78
  text "GND" at 6.477,10.55 h1.78
  text "P11" at 30.226,10.49 h1.78
  text "P16" at 6.477,8.001 h1.78
  text "P12" at 30.226,7.967 h1.78
  text "P15" at 11.43,7.366 h0.76
  text "VDD" at 6.477,5.461 h1.78
  text "P13" at 29.464,5.207 h1.78
  text "P15" at 6.477,2.921 h1.78
  text "P14" at 30.226,2.921 h1.78
  text "P12" at 6.858,0.762 h0.76
  text "RESET" at 29.972,0.762 h0.76
Bottom Overlay:
  lines w0.254: 1.016,30.607 38.989,30.607 ; 6.921,20.32 33.02,20.32 ; 9.474,12.573 9.474,27.686 ; 12.09,12.573 12.09,27.686 ; 14.707,12.573 14.707,27.686 ; 17.323,12.573 17.323,27.686 ; 19.939,12.573 19.939,27.686 ; 22.555,12.573 22.555,27.686 ; 25.171,12.573 25.171,27.686 ; 27.788,12.573 27.788,27.686 ; 30.404,12.573 30.404,27.686 ; 6.858,12.573 6.858,27.686 33.02,27.686 33.02,12.573 6.858,12.573
  text "P3.2" at 9.906,49.657 h1.91
  text "VDD" at 33.656,49.535 h1.91
  text "P1.4" at 9.906,47.117 h1.91
  text "GND" at 33.657,46.995 h1.91
  text "P1.5" at 9.906,44.577 h1.91
  text "P3.7" at 33.657,44.45 h1.91
  text "P1.6" at 9.906,42.037 h1.91
  text "P3.6" at 33.657,41.91 h1.91
  text "P1.7" at 9.906,39.497 h1.91
  text "P3.4" at 33.657,39.37 h1.91
  text "P3.4" at 33.657,39.37 h1.91
  text "P3.1" at 10.414,36.957 h1.91
  text "P3.3" at 33.657,36.83 h1.91
  text "P3.0" at 9.906,34.417 h1.91
  text "P1.1" at 33.657,34.29 h1.91
  text "CH-RX" at 8.639,27.267 h1.78 r90
  text "CH-TX" at 11.264,27.267 h1.78 r90
  text "CH-GND" at 13.888,27.267 h1.78 r90
  text "CH-VCC" at 16.512,27.267 h1.78 r90
  text "CH-MISO" at 19.136,27.267 h1.78 r90
  text "CH-VCC" at 21.761,27.267 h1.78 r90
  text "CH-MOSI" at 24.385,27.267 h1.78 r90
  text "CH-SCK" at 27.009,27.267 h1.78 r90
  text "ICP-RST" at 29.634,27.267 h1.78 r90
  text "CH-GND" at 32.258,27.267 h1.78 r90
  text "N76-TX" at 8.636,20.066 h1.78 r90
  text "N76-RX" at 11.26,20.066 h1.78 r90
  text "N76-GND" at 13.888,20.066 h1.78 r90
  text "N76-VCC" at 16.512,20.066 h1.78 r90
  text "NC" at 19.136,20.066 h1.78 r90
  text "N76-VCC" at 21.761,20.066 h1.78 r90
  text "ICP-DAT" at 24.385,20.066 h1.78 r90
  text "ICP-SCL" at 27.009,20.066 h1.78 r90
  text "ICP-RST" at 29.634,20.066 h1.78 r90
  text "N76-GND" at 32.258,20.066 h1.78 r90
Bottom Solder:
  text "JMi" at 28.448,4.191 h3.81
  text "N76E003 + CH551" at 27.94,2.032 h2.54